# Altium PCB RS422 Breakout.PcbDoc
Units mm, origin at the board's own origin, x right, y up, seen from the top; angles counter-clockwise.
Board outline 29.84 x 34.93 mm, 4 copper layers (L1 - Primary, L2 - GND, L3 - GND, L4 - Secondary), stack 1.57 mm thick; 47 components, 32 nets, 134 pads, 106 vias.
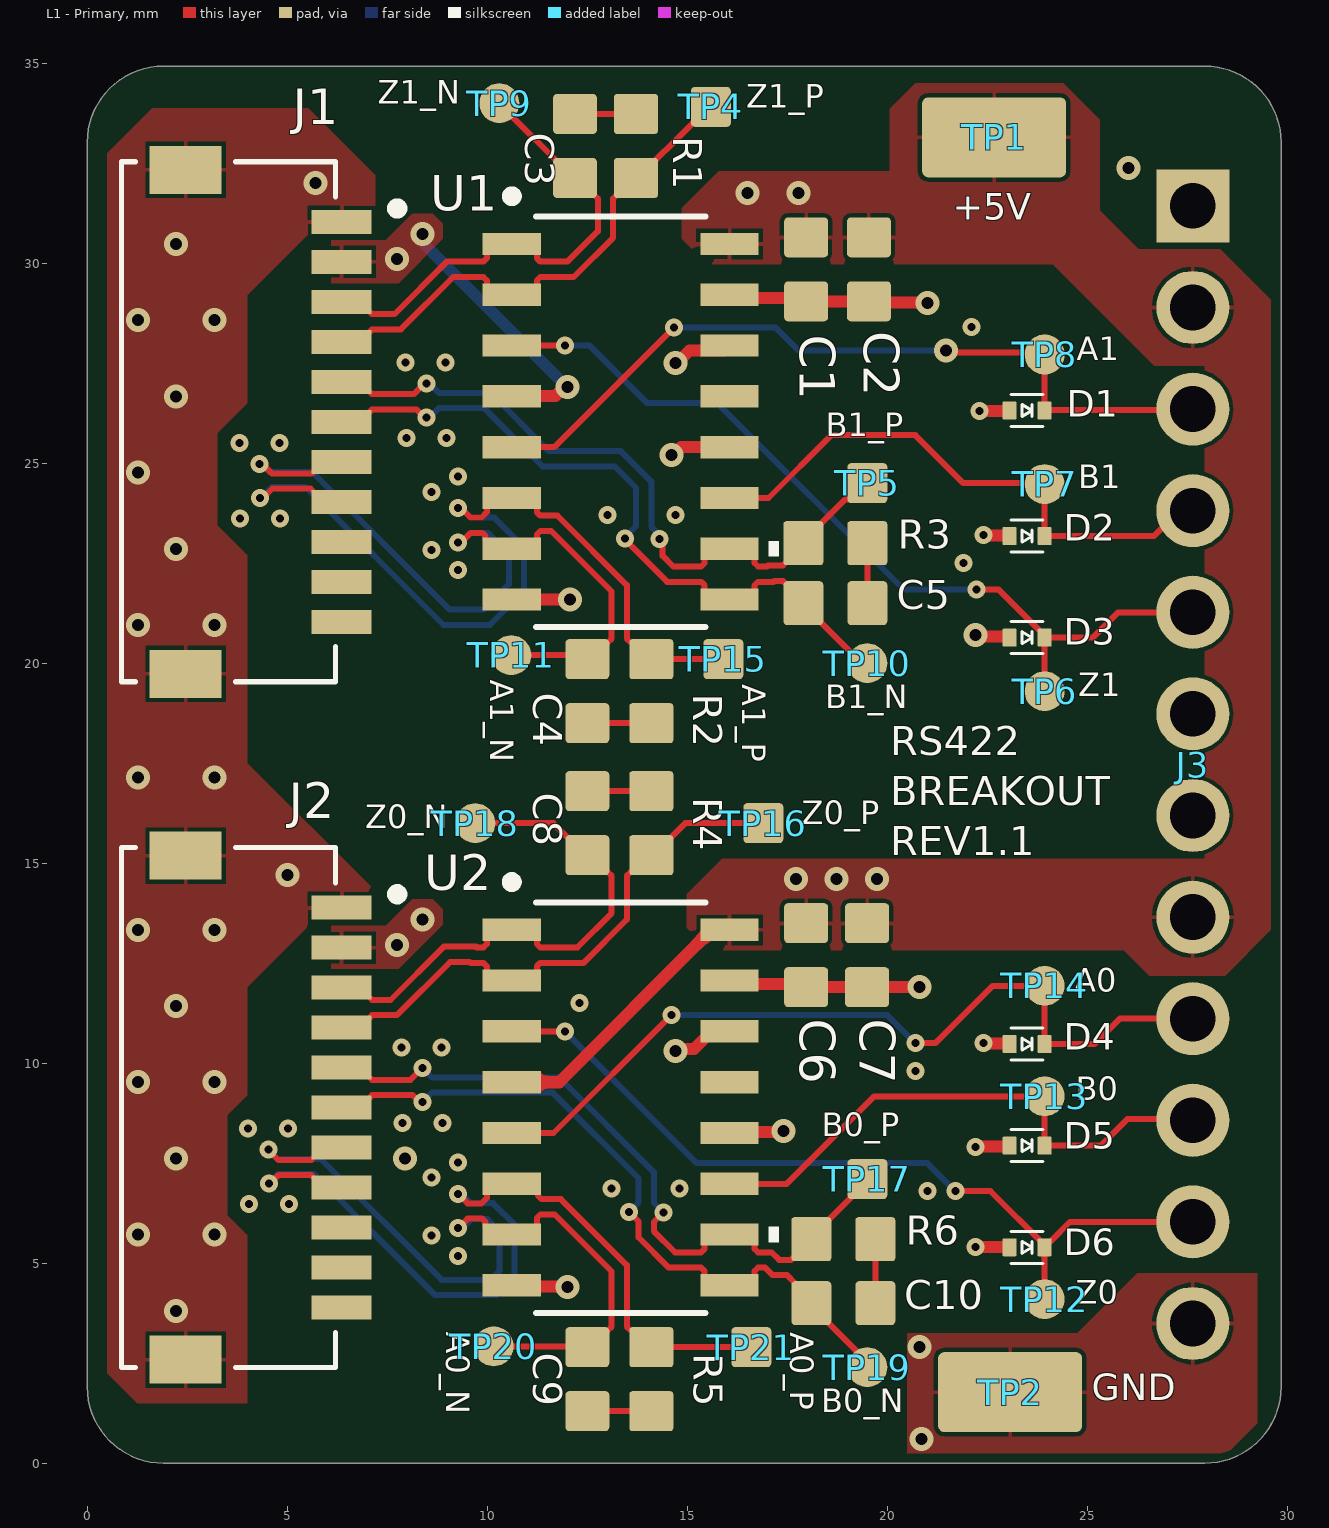
[diagram p0: L1 - Primary view]
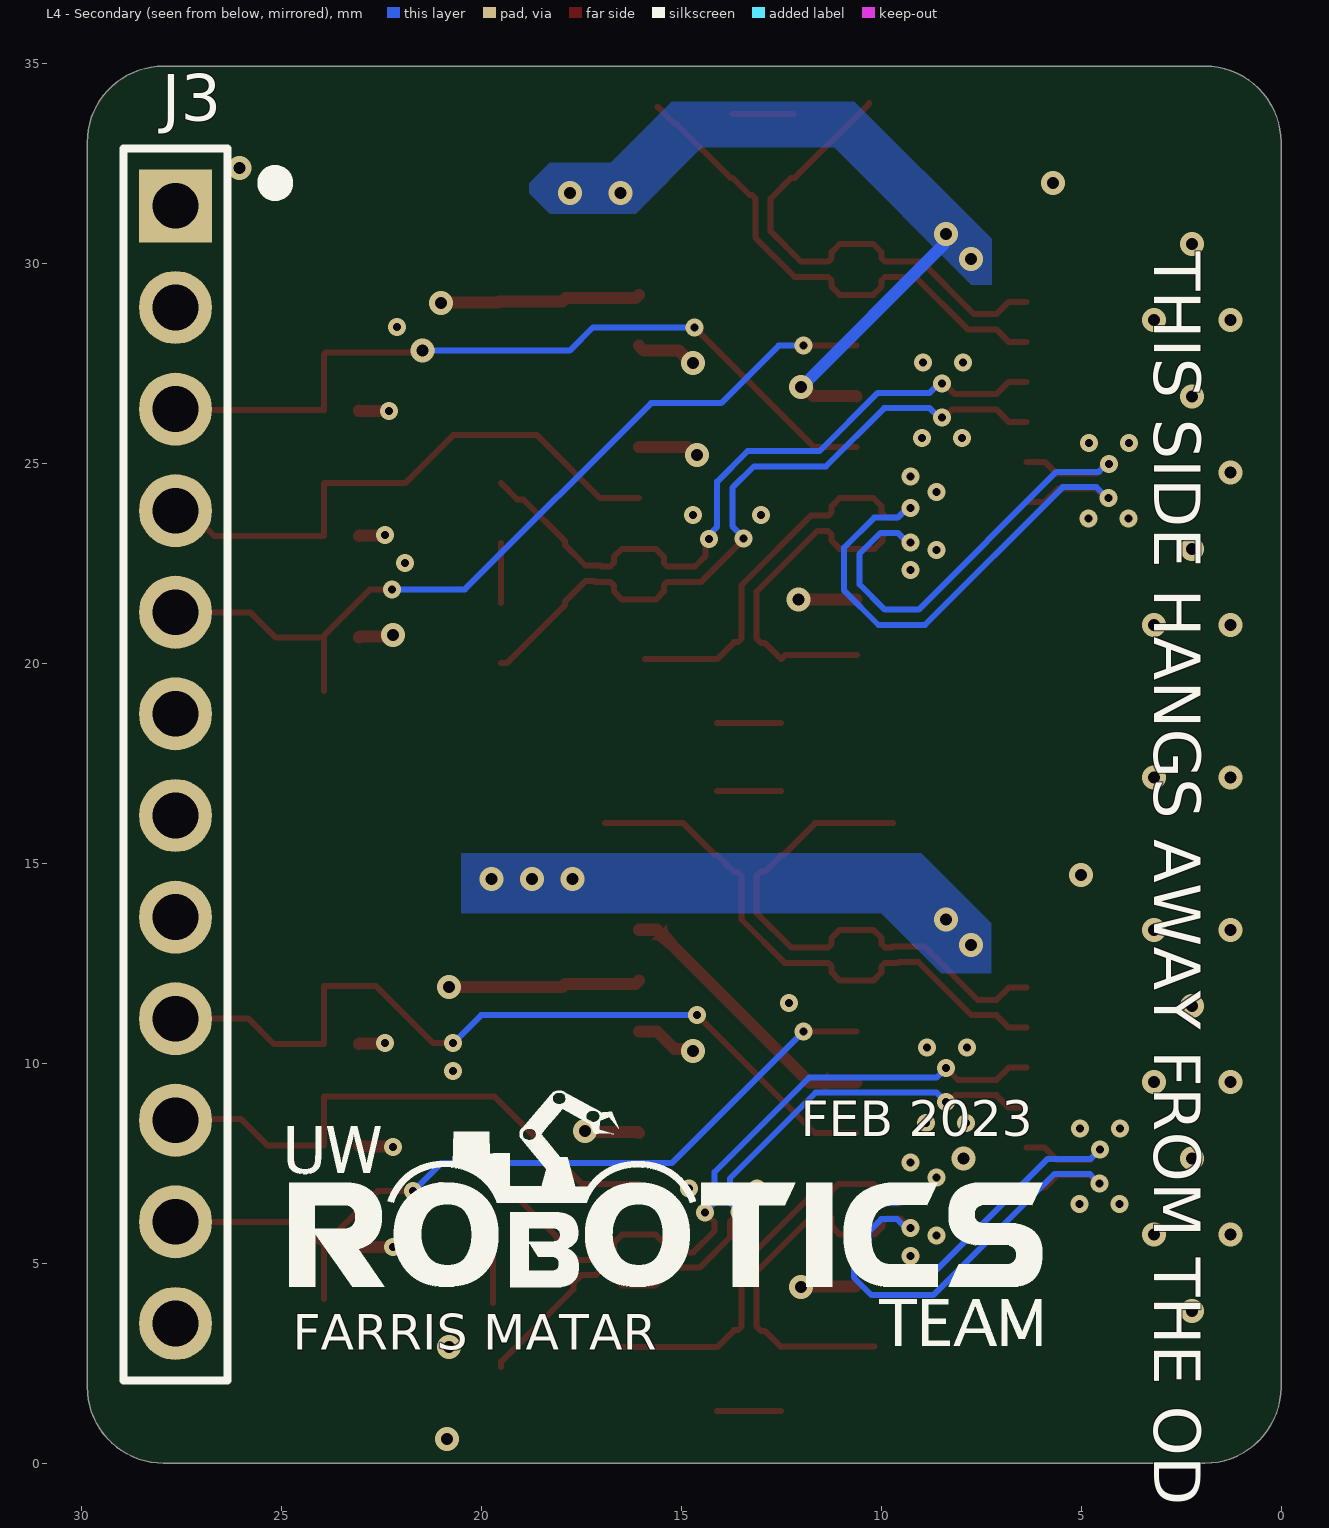
[diagram p1: L4 - Secondary view, seen from below]
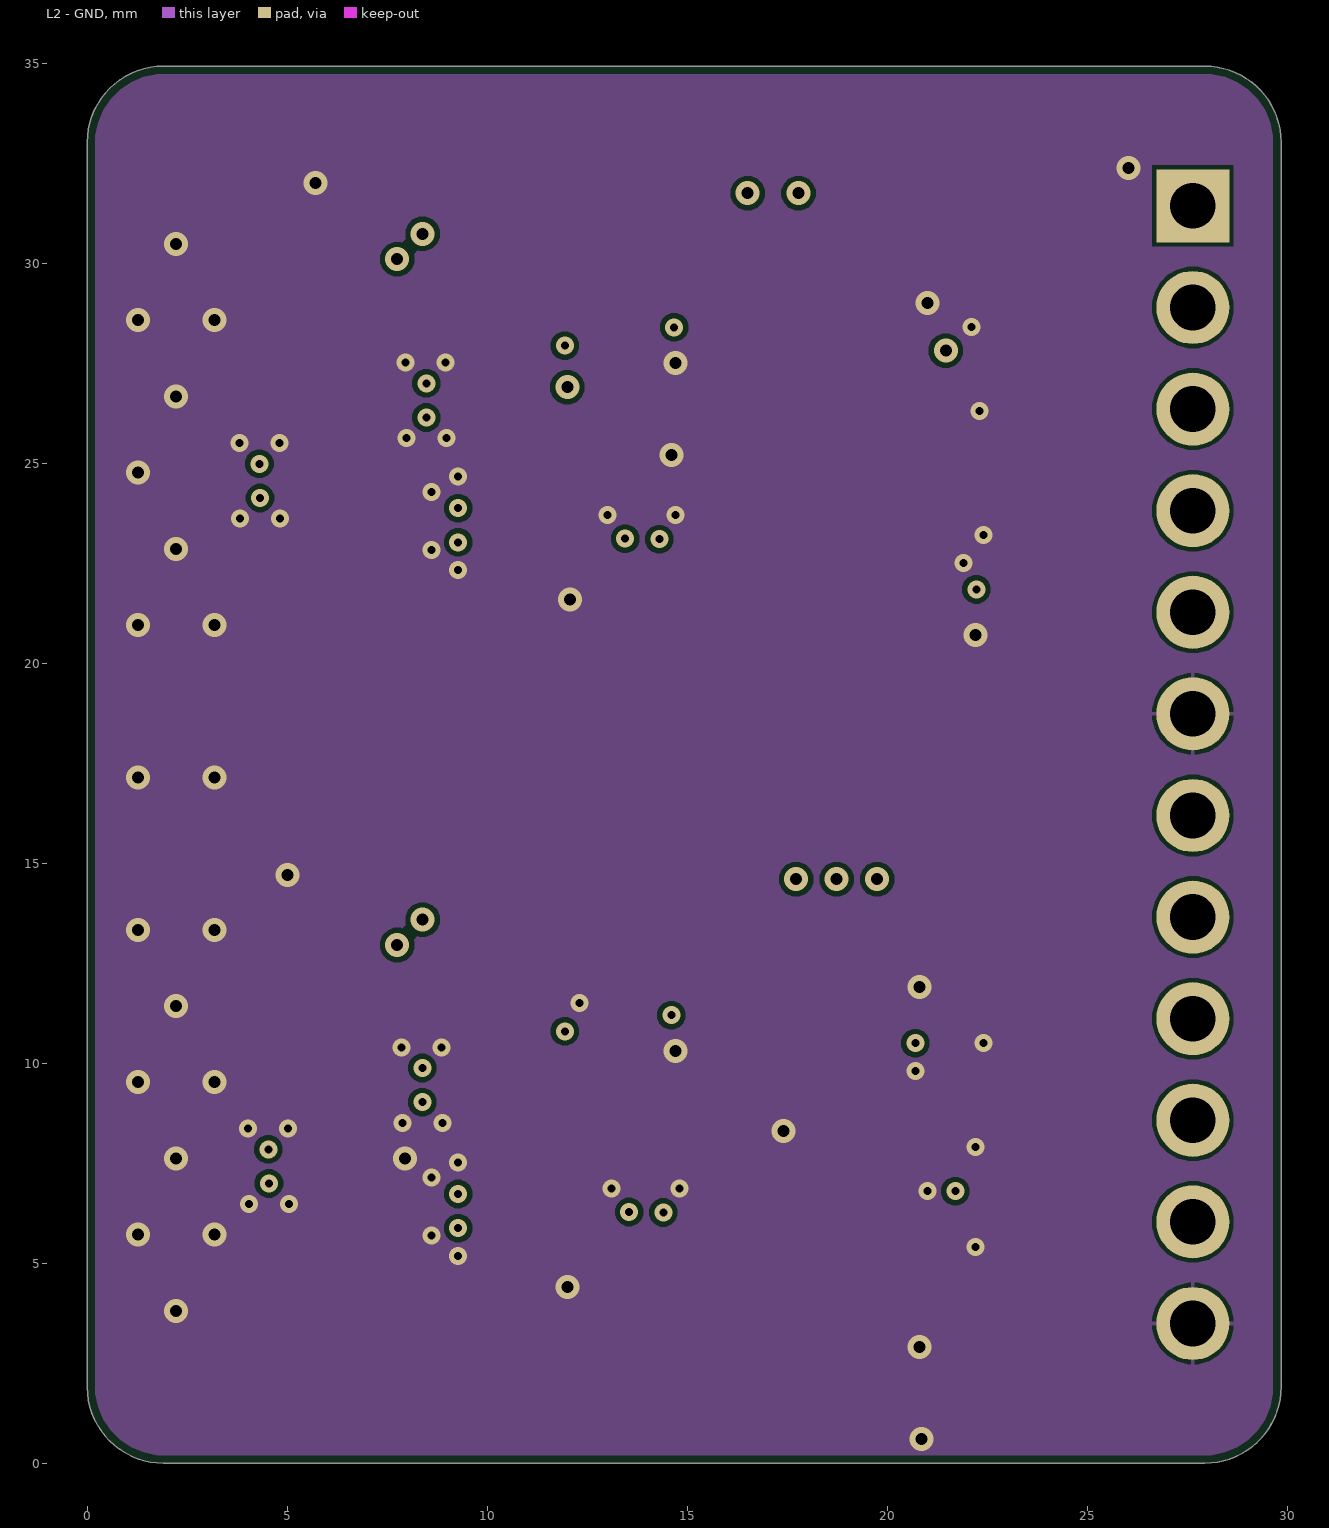
[diagram p2: L2 - GND]
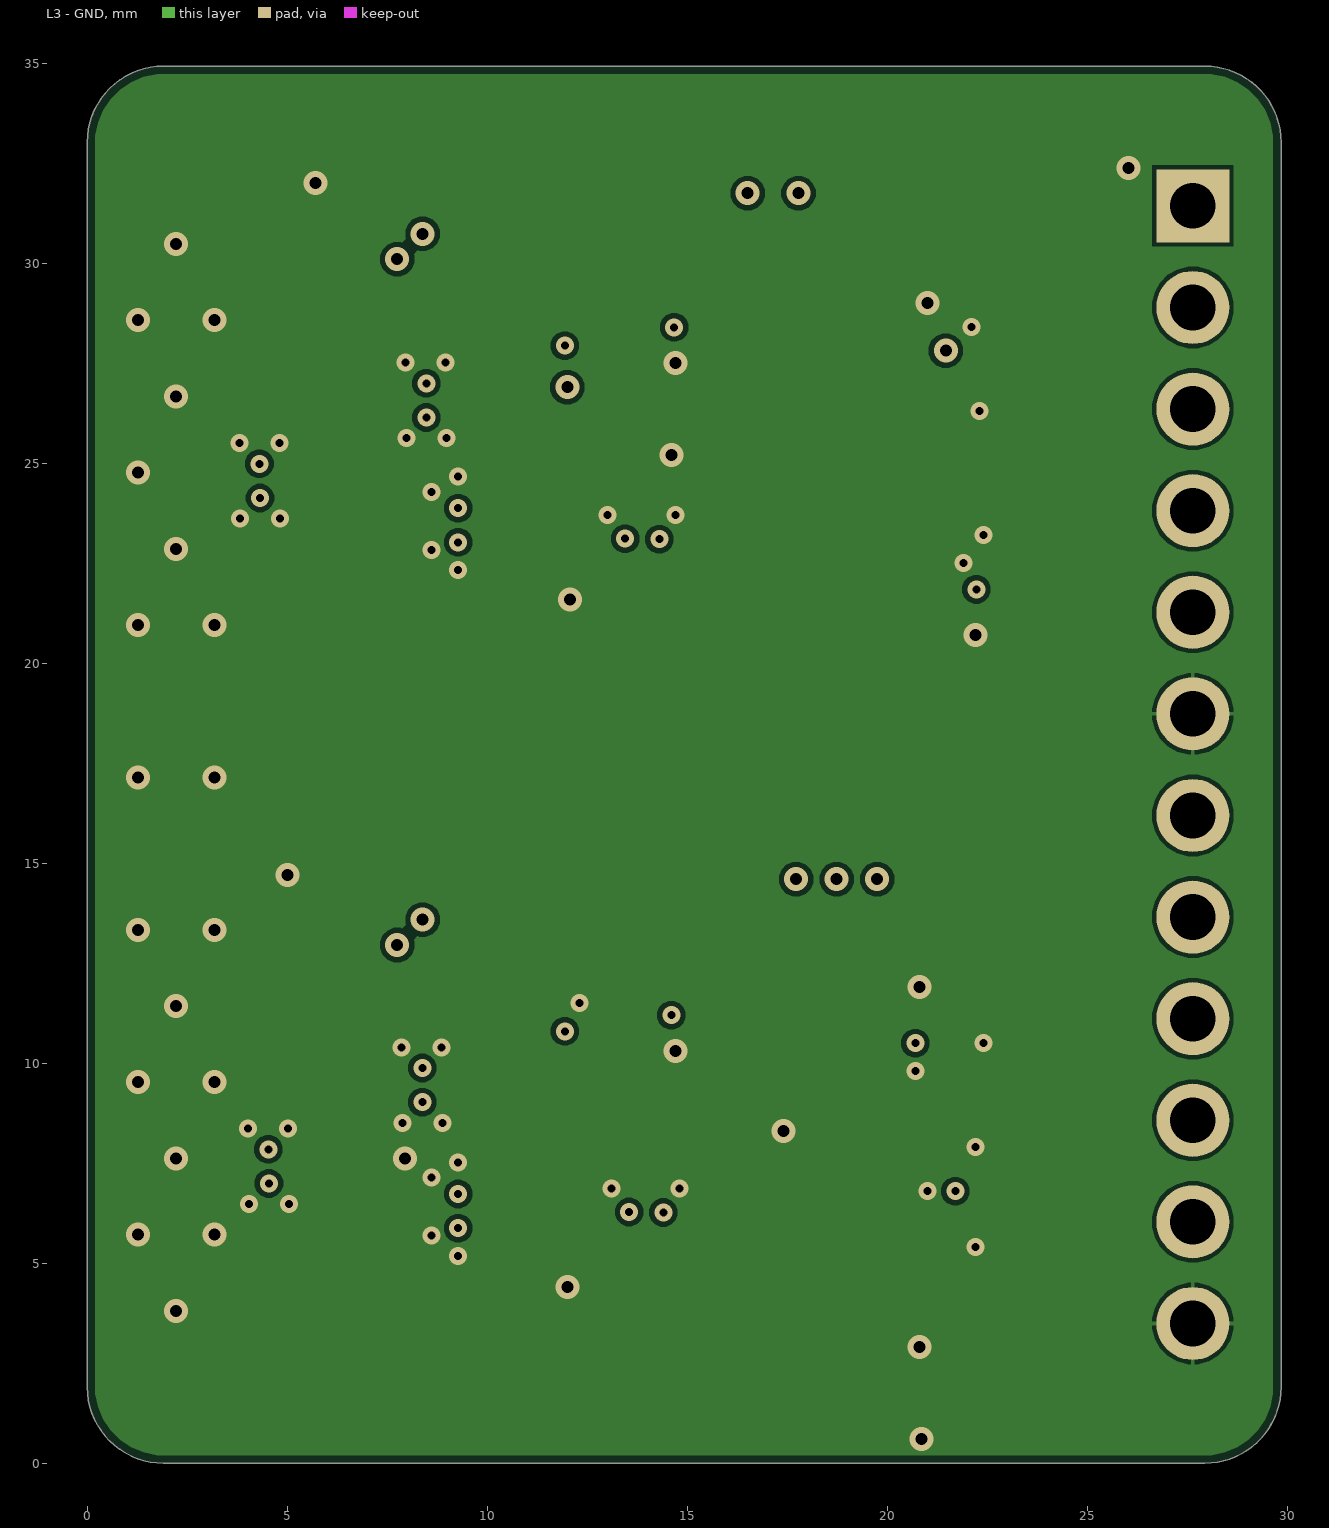
[diagram p3: L3 - GND]
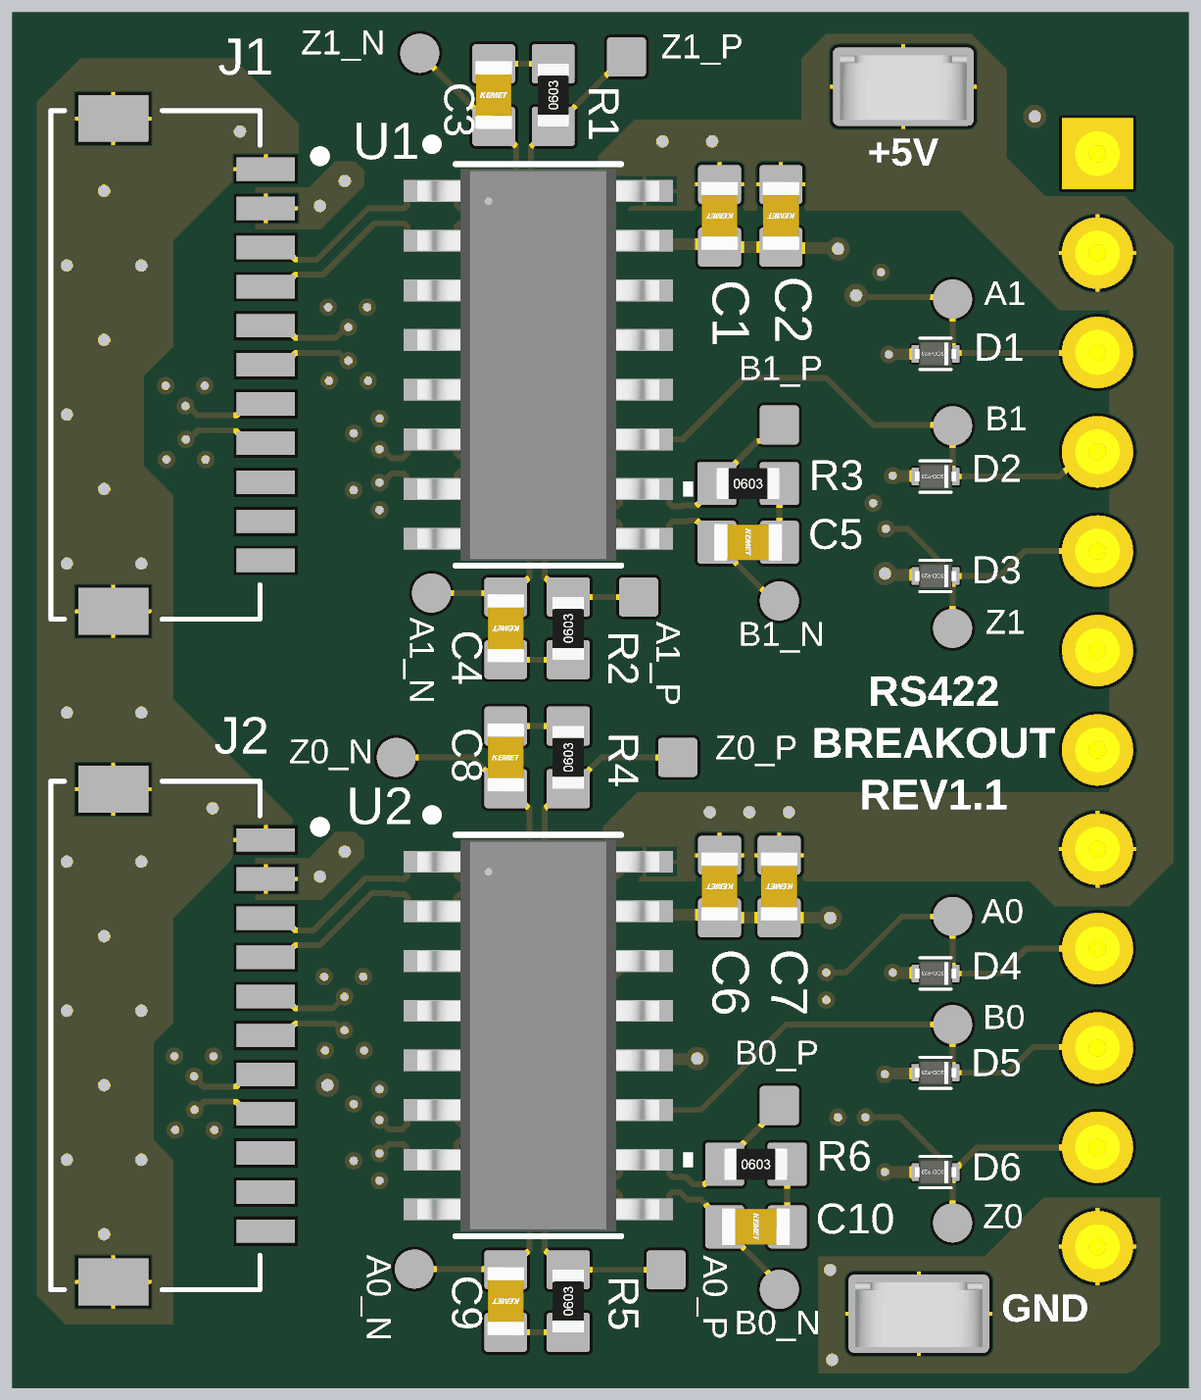
[diagram p4: 3D render of the assembled board from above, using the file's embedded part models]

## Layer stack, top to bottom
Top Solder: solder mask 0.0127, Solder Resist, Dk 3.8
L1 - Primary: signal copper 0.035
Dielectric 1: prepreg 0.2, 7628, Dk 4.6
L2 - GND: signal copper 0.0175
Core: core 1.065, FR-4, Dk 4.5
L3 - GND: signal copper 0.0175
Dielectric 2: prepreg 0.2, 7628, Dk 4.6
L4 - Secondary: signal copper 0.035
Bottom Solder: solder mask 0.0127, Solder Resist, Dk 3.8

## Board outline
0,1.905 0,33.02 cw(c1.905,33.02) 1.905,34.925 27.94,34.925 cw(c27.94,33.02) 29.845,33.02 29.845,1.905 cw(c27.94,1.905) 27.94,0 1.905,0 cw(c1.905,1.905)

## Design rules (kind name [scope] priority, off if disabled: settings)
BoardOutlineClearance [All] p1: gap=0.2 ignorepadtopadclearanceinfootprint=FALSE
Clearance [All] p1: gap=0.102 ignorepadtopadclearanceinfootprint=FALSE except(0.127: Arc-Via Track-Via SMDPad-Via THPad-Via Via-Via Via-Fill Via-Poly Via-Region Via-Text; 0.25: Arc-Hole Track-Hole SMDPad-Hole THPad-Hole Via-Hole Fill-Hole Poly-Hole Region-Hole Text-Hole)
ComponentClearance [All] p1: gap=0.102 collisioncheckmode=3 verticalgap=0.102 showdistances=TRUE
DiffPairsRouting [All] p1: maxlimit=0.232 minlimit=0.102 mostfreqgap=0.232 toplayer_mingap=0.232 toplayer_minwidth=0.15 toplayer_maxwidth=0.15 toplayer_prefwidth=0.15 bottomlayer_mingap=0.232 bottomlayer_minwidth=0.15 bottomlayer_maxwidth=0.15 bottomlayer_prefwidth=0.15 impedanceprofiledriven=TRUE impedanceprofileid={AE764A9E-1746-4FC1-8AB7-64DEA7011EAA} impedanceprofilevalue=120.000000 maxuncoupledlength=12.7
Height [All] p1: minheight=0 maxheight=1816.048 prefheight=12.7
HoleSize [All] p1: absolutevalues=TRUE maxlimit=6.3 minlimit=0.2 maxpercent=80.000 minpercent=20.000
HoleToHoleClearance [All] p1: gap=0.25 allowstackedmicrovias=FALSE
MinimumAnnularRing [All] p1: minimumring=0.076
MinimumSolderMaskSliver [All] p1: minsoldermaskwidth=0
PlaneClearance [All] p1: clearance=0.102
PlaneConnect PlaneConnectPowerPads [InPadClass('PowerPads')] p1: planeconnectstyle=Direct reliefexpansion=0.508 reliefentries=4 reliefconductorwidth=0.254 reliefairgap=0.254
PlaneConnect [All] p2: pad.planeconnectstyle=Relief pad.reliefexpansion=0.3 pad.reliefentries=4 pad.reliefconductorwidth=0.102 pad.reliefairgap=0.102 via.planeconnectstyle=Direct via.reliefexpansion=0.3 via.reliefentries=4 via.reliefconductorwidth=0.127 via.reliefairgap=0.127
PolygonConnect PolygonConnectPowerPads [All vs (InPadClass('PowerPads'))] p1: connectstyle=Direct reliefconductorwidth=0.254 reliefentries=4 polygonreliefangle="90 Angle" airgapwidth=0.254
PolygonConnect [All] p2: thpad.connectstyle=Relief thpad.reliefconductorwidth=0.102 thpad.reliefentries=4 thpad.polygonreliefangle="90 Angle" thpad.airgapwidth=0.102 smdpad.connectstyle=Relief smdpad.reliefconductorwidth=0.102 smdpad.reliefentries=4 smdpad.polygonreliefangle="90 Angle" smdpad.airgapwidth=0.102 via.connectstyle=Direct via.reliefconductorwidth=0.127 via.reliefentries=4 via.polygonreliefangle="90 Angle" via.airgapwidth=0.127
RoutingVias [All] p1: holewidth=0.2 width=0.45 viastyle="Through Hole" minholewidth=0.2 minwidth=0.45 maxholewidth=6.3 maxwidth=6.55
SilkToSilkClearance [All] p1: silktosilkclearance=0
SilkToSolderMaskClearance [IsPad] p1: minsilkscreentomaskgap=0.102 clearancetoexposedcopper=TRUE
SolderMaskExpansion [All] p1: expansion=0.075 istentingtop=FALSE
Width [All] p1: maxlimit=1816.048 minlimit=0.102 preferedwidth=0.102
20 further rules are at their usual default settings.

## Classes and differential pairs
differential pair Z1: +Z1_P -Z1_N
differential pair Z0: +Z0_P -Z0_N
differential pair B1: +B1_P -B1_N
differential pair B0: +B0_P -B0_N
differential pair A1: +A1_P -A1_N
differential pair A0: +A0_P -A0_N

## Components (designator, comment, footprint, x,y, rotation, side; value= is the part's Value field where it differs from the comment)
C1 "CAP_1uF_25V_0603" CAP0603 17.971,29.845 r90 top value=1μF
C2 "CAP_0.1uF_10V_0603" CAP0603 19.541,29.845 r90 top value=0.1µF
C3 "CAP_0.01uF_100V_0603" CAP0603 12.192,32.931 r270 top value=0.01μF
C4 "CAP_0.01uF_100V_0603" CAP0603 12.5,19.3 r90 top value=0.01μF
C5 "CAP_0.01uF_100V_0603" CAP0603 18.7,21.5 r180 top value=0.01μF
C6 "CAP_1uF_25V_0603" CAP0603 17.971,12.7 r90 top value=1μF
C7 "CAP_0.1uF_10V_0603" CAP0603 19.495,12.7 r90 top value=0.1µF
C8 "CAP_0.01uF_100V_0603" CAP0603 12.5,16 r270 top value=0.01μF
C9 "CAP_0.01uF_100V_0603" CAP0603 12.5,2.1 r90 top value=0.01μF
C10 "CAP_0.01uF_100V_0603" CAP0603 18.9,4 r180 top value=0.01μF
D1 "TVS_DIODE_UNIDIR_5V" sod-923 23.495,26.317 r180 top
D2 "TVS_DIODE_UNIDIR_5V" sod-923 23.495,23.177 r180 top
D3 "TVS_DIODE_UNIDIR_5V" sod-923 23.495,20.637 r180 top
D4 "TVS_DIODE_UNIDIR_5V" sod-923 23.495,10.477 r180 top
D5 "TVS_DIODE_UNIDIR_5V" sod-923 23.495,7.938 r180 top
D6 "TVS_DIODE_UNIDIR_5V" sod-923 23.495,5.397 r180 top
J1 "CON_12M_SM_RA" MOLEX-5015681107 3.81,26.035 r270 top
J2 "CON_12M_SM_RA" MOLEX-5015681107 3.81,8.89 r270 top
J3 "Samtech, TS-112-T-A" Samtech-TS-112-T-A 27.64,17.462 r0 top
R1 "RES_120Ω_0603_5%" RES0603 13.716,32.131 r90 top value=120Ω
R2 "RES_120Ω_0603_5%" RES0603 14.1,18.5 r90 top value=120Ω
R3 "RES_120Ω_0603_5%" RES0603 17.9,23 r0 top value=120Ω
R4 "RES_120Ω_0603_5%" RES0603 14.1,15.2 r90 top value=120Ω
R5 "RES_120Ω_0603_5%" RES0603 14.1,1.3 r90 top value=120Ω
R6 "RES_120Ω_0603_5%" RES0603 18.1,5.6 r0 top value=120Ω
TP1 "TESTPOINT_SMD_LOOP" S1751-46R 22.671,33.147 r0 top
TP2 "TESTPOINT_SMD_LOOP" S1751-46R 23.071,1.778 r0 top
TP4 "TESTPOINT_1MM_SQUARE" TESTPOINT_SQUARE_1MM 15.588,33.909 r270 top
TP5 "TESTPOINT_1MM_SQUARE" TESTPOINT_SQUARE_1MM 19.5,24.5 r90 top
TP6 "TESTPOINT_1MM_CIRCLE" TESTPOINT_CIRCLE_1MM 23.932,19.3 r90 top
TP7 "TESTPOINT_1MM_CIRCLE" TESTPOINT_CIRCLE_1MM 23.932,24.477 r90 top
TP8 "TESTPOINT_1MM_CIRCLE" TESTPOINT_CIRCLE_1MM 23.932,27.717 r90 top
TP9 "TESTPOINT_1MM_CIRCLE" TESTPOINT_CIRCLE_1MM 10.3,34 r270 top
TP10 "TESTPOINT_1MM_CIRCLE" TESTPOINT_CIRCLE_1MM 19.5,20 r90 top
TP11 "TESTPOINT_1MM_CIRCLE" TESTPOINT_CIRCLE_1MM 10.6,20.2 r90 top
TP12 "TESTPOINT_1MM_CIRCLE" TESTPOINT_CIRCLE_1MM 23.932,4.1 r90 top
TP13 "TESTPOINT_1MM_CIRCLE" TESTPOINT_CIRCLE_1MM 23.932,9.171 r90 top
TP14 "TESTPOINT_1MM_CIRCLE" TESTPOINT_CIRCLE_1MM 23.932,11.935 r90 top
TP15 "TESTPOINT_1MM_SQUARE" TESTPOINT_SQUARE_1MM 15.9,20.1 r90 top
TP16 "TESTPOINT_1MM_SQUARE" TESTPOINT_SQUARE_1MM 16.9,16 r90 top
TP17 "TESTPOINT_1MM_SQUARE" TESTPOINT_SQUARE_1MM 19.5,7.1 r90 top
TP18 "TESTPOINT_1MM_CIRCLE" TESTPOINT_CIRCLE_1MM 9.7,16 r90 top
TP19 "TESTPOINT_1MM_CIRCLE" TESTPOINT_CIRCLE_1MM 19.5,2.4 r90 top
TP20 "TESTPOINT_1MM_CIRCLE" TESTPOINT_CIRCLE_1MM 10.16,2.921 r90 top
TP21 "TESTPOINT_1MM_SQUARE" TESTPOINT_SQUARE_1MM 16.6,2.9 r90 top
U1 "SN75ALS193DR" SOIC127P600X175-16N 13.335,26.035 r0 top
U2 "SN75ALS193DR" SOIC127P600X175-16N 13.335,8.89 r0 top

## Footprints (in the part's own frame and the unit in brackets; to place one, negate y for a bottom-side part, rotate by r counter-clockwise, add the part's x,y. Pads: shape width x height; smd on the part's side, far side on the other; paste and mask are expansions set on the pad)
CAP0603 [mm]
  rrect20% 1x1.1 smd: 1(-0.8,0) 2(0.8,0)
  body extent -0.87,-0.48 0.88,0.48, height 0.87
MOLEX-5015681107 [mm]
  rect 0.6x1.5 smd mask+0: 1(-5,2.55) 2(-4,2.55) 3(-3,2.55) 4(-2,2.55) 5(-1,2.55) 6(0,2.55) 7(1,2.55) 8(2,2.55) 9(3,2.55) 10(4,2.55) 11(5,2.55)
  rect 1.2x1.8 smd mask+0: S1(6.3,-1.35) S2(-6.3,-1.35)
  silkscreen extent -6.5,-2.95 6.5,2.4
RES0603 [mm] "Chip Resistor, Body 1.6x0.8mm, IPC Medium Density"
  rrect15% 1x1.1 smd: 1(0,0) 2(1.6,0)
  body extent 0,-0.4 1.6,0.4, height 0.46
S1751-46R [mm] "SMD LOOP TESTPOINT"
  rrect15% 3.6x2 smd: 1(0,0)
  body extent -1.63,-0.85 1.62,0.8, height 2.01
Samtech-TS-112-T-A [mil] "Samtech CONN HEADER VERT 12POS 2.54MM"
  rect 71.93x71.93 hole 45: 1(0,550)
  round 71.93 hole 45: 2(0,450) 3(0,350) 4(0,250) 5(0,150) 6(0,50) 7(0,-50) 8(0,-150) 9(0,-250) 10(0,-350) 11(0,-450) 12(0,-550)
  body extent -50,-604 50,604, height 120
sod-923 [mm]
  rrect15% 0.35x0.45 smd mask+0.05: 1(-0.437,0) 2(0.437,0)
  silkscreen extent -0.4,-0.4 0.4,0.4, body extent -0.53,-0.32 0.53,0.32, height 0.43
SOIC127P600X175-16N [mm]
  rect 1.455x0.558 smd paste+0 mask+0: 1(-2.721,4.445) 2(-2.721,3.175) 3(-2.721,1.905) 4(-2.721,0.635) 5(-2.721,-0.635) 6(-2.721,-1.905) 7(-2.721,-3.175) 8(-2.721,-4.445) 9(2.721,-4.445) 10(2.721,-3.175) 11(2.721,-1.905) 12(2.721,-0.635) 13(2.721,0.635) 14(2.721,1.905) 15(2.721,3.175) 16(2.721,4.445)
  silkscreen extent -2.84,-5.13 3.96,5.76, body extent -3.1,-5 3.1,5, height 1.76
TESTPOINT_CIRCLE_1MM [mm]
  round 1 smd: 1(0,0)
TESTPOINT_SQUARE_1MM [mm]
  rrect20% 1x1 smd: 1(0,0)

## Part data
C1 C6: "CAP CER 1UF 25V X5R 0603", Dielectric=X5R, Manufacturer 1=Samsung, Manufacturer Part Number 1=CL10A105KA8NNNC, Package=0603, Supplier Part Number 1=1276-1102-1-ND, Voltage Rating=25V, Mounting Type=SMD, Supplier 1=Digi-Key
C2 C7: "CAP CER 0.1UF 10V X7R 0402", Manufacturer 1="Murata Electronics", Manufacturer Part Number 1=GRM155R71A104KA01D, Package/Footprint=0402, Supplier Part Number 1=490-6321-1-ND, Voltage Rating=10V, Supplier 1=Digi-Key
C3 C4 C5 C8 C9 C10: "CAP CER 0.01uF 100V X7R 0603", Dielectric=X7R, Manufacturer 1="Murata Electronics", Manufacturer Part Number 1=GCM188R72A103KA37J, Supplier Part Number 1=490-8028-1-ND, Voltage Rating=100V, Supplier 1=Digi-Key
D1 D4: "TVS DIODE 5VWM 12.3VC SOD923", Clamping Voltage-Max=12.3V, Manufacturer 1="ON Semiconductor", Manufacturer Part Number 1=ESD9X5.0ST5G, Min Breakdown Voltage=6.2V, Supplier Part Number 1=ESD9X5.0ST5GOSCT-ND, Supplier 1=Digi-Key
D2 D3 D5 D6: "TVS DIODE 5VWM 12.3VC SOD923", Clamping Voltage-Max=12.3V, Manufacturer 1="ON Semiconductor", Min Breakdown Voltage=6.2V, Supplier Part Number 1=ESD9X5.0ST5GOSCT-ND, Supplier 1=Digi-Key
J1 J2: library part CON_11M_SM_RA, "CONN HEADER SMD RIGHT ANGLE 1MM PITCH", Package=None, Supplier Part Number 1=WM7902CT-ND, Availability=Unavailable, MP="Molex, 5015681107", Price=None, Supplier 1=Digi-Key
J3: library part CON_12M_TH_VERT_2.54mm, "CONN HEADER THROUGH HOLE VERTICAL 2.54MM PITCH", Supplier Part Number 1=SAM12216-ND, Manufacturing Part Number="Samtech, TS-112-T-A", Supplier 1=Digi-Key
R1 R2 R3 R4 R5 R6: "RES 120 OHM 5% 1/10W 0603", Manufacturer 1=Yageo, Manufacturer Part Number 1=RC0603JR-07120RL, Package/Footprint=0603, Supplier Part Number 1=311-120GRCT-ND, Mounting Type=SMD, Supplier 1=Digi-Key
TP1 TP2: "TESTPOINT SMD LOOP", Manufacturer 1=Harwin, Manufacturer Part Number 1=S1751-46R, Package/Footprint=SMD, Supplier Part Number 1=952-1478-1-ND, Mounting Type=SMD, Supplier 1=Digi-Key
TP4 TP5 TP15 TP16 TP17 TP21: "TESTPOINT 1MM SQUARE"
TP6 TP7 TP8 TP9 TP10 TP11 TP12 TP13 TP14 TP18 TP19 TP20: "TESTPOINT 1MM CIRCLE"
U1 U2: "0/4 Receiver - RS422, RS423 16-SOIC", Mfr_Name="Texas Instruments", Supplier Part Number 1=296-24362-1-ND, Copyright="Copyright (C) 2021 Ultra Librarian. All rights reserved.", Manufacturer_Part_Number=SN75ALS193DR, RefDes=RefDes, Supplier 1=Digi-Key, Type=DEV

## Via types
v1: diameter 0.45, hole 0.2, L1 - Primary to L4 - Secondary, tented both sides, 61 vias
v2: diameter 0.6, hole 0.3, L1 - Primary to L4 - Secondary, tented both sides, 45 vias

## Nets (pads, with @x,y where several pads share a name; then routed paths per layer and width w, separated by ;. In a path a pad name is that pad's centre, name@x,y a point inside that pad or via, vN(x,y) a via of type N, cw(c..) or ccw(c..) an arc to the next point about the centre after c; other vN are vias at no path point)
5V: C1.2 C2.2 C6.2 C7.2 J1.2 J2.2 J3.2 J3.8 TP1.1 U1.4 U1.16 U2.4 U2.16 | length 13.8
  L1 - Primary w0.3: U1.4 10.629,26.685 11.704,26.685 11.919,26.9 v2(12,26.9)
  L1 - Primary w0.305: U2.4 11.798,9.525 15.481,13.208 15.608,13.335 U2.16
  L4 - Secondary w0.3: v2(8.382,30.734) 8.439,30.677 8.439,30.461 v2(12,26.9)
  other v2: 7.747,12.954 8.382,13.589 17.721,14.6 18.733,14.6 19.745,14.6 7.747,30.099 16.51,31.75 17.78,31.75
A0: D4.1 J3.9 TP14.1 U2.5 | length 20.9
  L1 - Primary w0.15: U2.5 11.655,8.255 v1(14.6,11.2) ; v1(20.7,10.5) 21.2,10.5 22.635,11.935 TP14.1 D4.1 25.177,10.477 25.812,11.112 J3.9
  L4 - Secondary w0.15: v1(14.6,11.2) 20,11.2 v1(20.7,10.5)
A0_N: C9.2 J2.7 TP20.1 U2.7 | length 21.2
  L1 - Primary w0.15: v1(4.526,7.847) 4.526,7.832 4.777,7.581 5.601,7.581 5.91,7.89 J2.7 ; v1(9.271,5.877) 9.273,5.877 9.509,6.113 9.873,6.113 9.961,6.025 9.961,5.919 10.165,5.715 U2.7 11.034,5.715 11.238,5.919 11.238,6.13 11.326,6.218 11.682,6.218 13.109,4.791 13.109,3.413 13.006,3.31 12.91,3.31 C9.2 12.479,2.921 TP20.1
  L4 - Secondary w0.15: v1(4.526,7.847) v1(4.526,7.847) 4.764,7.611 5.829,7.611 8.858,4.582 10.082,4.582 10.3,4.8 10.3,5.8 10,6.1 9.6,6.1 9.377,5.877 v1(9.271,5.877)
A0_P: J2.8 R5.2 TP21.1 U2.6 | length 23.1
  L1 - Primary w0.15: v1(4.541,6.993) 4.572,6.993 4.779,7.199 5.601,7.199 5.91,6.89 J2.8 ; v1(9.271,6.731) 9.273,6.731 9.509,6.495 9.855,6.495 9.989,6.629 9.989,6.781 10.193,6.985 11.062,6.985 11.266,6.781 11.266,6.688 11.354,6.6 11.84,6.6 13.491,4.949 13.491,3.413 13.579,3.325 13.675,3.325 R5.2 TP21.1
  L4 - Secondary w0.15: v1(4.541,6.993) v1(4.541,6.993) 4.779,7.229 5.671,7.229 8.7,4.2 10.24,4.2 10.682,4.642 10.682,5.958 10.14,6.5 9.584,6.5 9.353,6.731 v1(9.271,6.731)
A1: D1.1 J3.3 TP8.1 U1.5 | length 20
  L1 - Primary w0.15: U1.5 11.672,25.4 v1(14.67,28.397) ; v2(21.463,27.813) 21.511,27.765 23.885,27.765 TP8.1 D1.1 23.95,26.335 27.622,26.335 J3.3
  L4 - Secondary w0.15: v1(14.67,28.397) 17.203,28.397 17.787,27.813 v2(21.463,27.813)
A1_N: C4.2 J1.7 TP11.1 U1.7 | length 21.6
  L1 - Primary w0.15: v1(4.303,24.984) 4.38,24.984 4.616,24.748 5.623,24.748 5.91,25.035 J1.7 ; v1(9.271,23.022) 9.348,23.022 9.584,23.258 9.873,23.258 9.961,23.17 9.961,23.064 10.165,22.86 U1.7 11.034,22.86 11.238,23.064 11.238,23.216 11.326,23.304 11.596,23.304 13.109,21.791 13.109,20.613 13.006,20.51 12.91,20.51 C4.2 12.4,20.2 TP11.1
  L4 - Secondary w0.15: v1(4.303,24.984) 4.349,24.984 4.551,24.782 5.618,24.782 9.063,21.337 9.907,21.337 10.541,21.971 10.541,22.733 10.016,23.258 9.584,23.258 9.348,23.022 v1(9.271,23.022)
A1_P: J1.8 R2.2 TP15.1 U1.6 | length 23.5
  L1 - Primary w0.15: v1(4.318,24.13) 4.395,24.13 4.631,24.366 5.579,24.366 5.91,24.035 J1.8 ; v1(9.271,23.876) 9.348,23.876 9.584,23.64 9.855,23.64 9.989,23.774 9.989,23.926 10.193,24.13 U1.6 11.034,24.13 11.238,23.926 11.238,23.774 11.326,23.686 11.754,23.686 13.491,21.949 13.491,20.613 13.579,20.525 13.675,20.525 R2.2 TP15.1
  L4 - Secondary w0.15: v1(4.318,24.13) 4.344,24.13 4.614,24.4 5.46,24.4 8.905,20.955 10.065,20.955 10.923,21.813 10.923,22.891 10.174,23.64 9.584,23.64 9.348,23.876 v1(9.271,23.876)
B0: D5.1 J3.10 TP13.1 U2.11 | length 14
  L1 - Primary w0.15: U2.11 17.485,6.985 19.671,9.171 TP13.1 D5.1 25.337,7.938 26,8.6 27.612,8.6 J3.10
B0_N: C10.2 J2.6 TP19.1 U2.9 | length 18.1
  L1 - Primary w0.15: J2.6 6.81,8.89 7.119,9.199 8.136,9.199 8.31,9.025 v1(8.374,9.025) ; v1(13.546,6.279) v1(13.546,6.279) 13.782,6.042 13.782,5.642 14.535,4.889 15.344,4.889 15.432,4.801 15.432,4.649 15.636,4.445 U2.9 16.477,4.445 16.681,4.649 16.681,4.801 16.769,4.889 16.947,4.889 17.136,4.7 17.496,4.7 17.69,4.506 17.69,4.346 19.5,2.536 TP19.1
  L4 - Secondary w0.15: v1(8.374,9.025) 8.376,9.025 8.612,9.261 11.639,9.261 13.782,7.118 13.782,6.517 13.546,6.281 v1(13.546,6.279)
B0_P: J2.5 R6.1 TP17.1 U2.10 | length 17.9
  L1 - Primary w0.15: J2.5 6.81,9.89 7.119,9.581 8.078,9.581 v1(8.374,9.879) v1(8.374,9.879) ; v1(14.4,6.267) v1(14.4,6.267) 14.164,6.029 14.164,5.8 14.693,5.271 15.344,5.271 15.432,5.359 15.432,5.511 15.636,5.715 U2.10 16.477,5.715 16.681,5.511 16.681,5.359 16.769,5.271 17.105,5.271 17.294,5.082 17.587,5.082 17.63,5.125 17.675,5.125 R6.1@18.1,5.55 ; R6.1 18.1,5.65 19.09,6.64 19.09,6.69 TP17.1
  L4 - Secondary w0.15: v1(8.374,9.879) 8.376,9.879 8.612,9.643 11.797,9.643 14.164,7.276 14.164,6.505 14.4,6.269 v1(14.4,6.267)
B1: D2.1 J3.4 TP7.1 U1.11 | length 14.3
  L1 - Primary w0.15: U1.11 17.03,24.13 18.6,25.7 20.7,25.7 21.9,24.5 23.91,24.5 TP7.1 D2.1 26.664,23.177 27.299,23.812 J3.4
B1_N: C5.2 J1.6 TP10.1 U1.9 | length 17.9
  L1 - Primary w0.15: J1.6 6.81,26.035 7.119,26.344 8.224,26.344 8.427,26.141 v1(8.474,26.141) ; v1(13.446,23.112) 13.446,23.083 14.495,22.034 15.344,22.034 15.432,21.946 15.432,21.794 15.636,21.59 U1.9 16.477,21.59 16.681,21.794 16.681,21.946 16.769,22.034 17.15,22.034 17.175,22.059 17.387,22.059 17.9,21.546 C5.2 17.9,21.464 19.364,20 TP10.1
  L4 - Secondary w0.15: v1(8.474,26.141) 8.551,26.141 8.787,26.378 9.922,26.378 11.382,24.918 13.182,24.918 13.718,24.382 13.718,23.424 13.446,23.152 v1(13.446,23.112)
B1_P: J1.5 R3.1 TP5.1 U1.10 | length 17.7
  L1 - Primary w0.15: J1.5 6.81,27.035 7.119,26.726 8.158,26.726 8.427,26.995 v1(8.474,26.995) ; v1(14.3,23.1) 14.386,23.014 14.386,22.682 14.653,22.416 15.344,22.416 15.432,22.504 15.432,22.656 15.636,22.86 U1.10 16.477,22.86 16.681,22.656 16.681,22.504 16.769,22.416 16.992,22.416 17.017,22.441 17.391,22.441 17.9,22.95 R3.1 17.9,23.05 18.94,24.09 19.09,24.09 TP5.1
  L4 - Secondary w0.15: v1(8.474,26.995) 8.551,26.995 8.787,26.759 10.081,26.759 11.54,25.3 13.34,25.3 14.1,24.54 14.1,23.413 14.3,23.213 v1(14.3,23.1)
GND: C1.1 C2.1 C6.1 C7.1 D1.2 D2.2 D3.2 D4.2 D5.2 D6.2 J1.1 J1.S1 J1.S2 J2.1 J2.S1 J2.S2 J3.6 J3.12 TP2.1 U1.8 U1.12 U1.14 U1.15 U2.8 U2.12 U2.14 U2.15 | length 23.4
  L1 - Primary w0.3: U2.8 10.636,4.423 11.977,4.423 v2(12,4.4) ; U1.8 v2(12.065,21.59) ; v2(14.6,25.2) 14.641,25.2 14.841,25.4 U1.12 ; v2(14.7,10.3) 14.757,10.357 15.17,10.357 15.608,10.795 U2.14 ; v2(14.7,27.5) 14.741,27.5 15.052,27.811 15.927,27.811 U1.14 ; U2.12 16.079,8.278 17.378,8.278 v2(17.4,8.3) ; U2.15 16.139,11.983 17.889,11.983 C6.1 v2(20.8,11.9) ; U1.15 16.139,29.128 17.889,29.128 C1.1 C2.1 19.564,29.022 20.978,29.022 v2(21,29) ; v1(22.2,5.4) 22.201,5.399 23.056,5.399 D6.2 ; v1(22.2,7.9) 22.219,7.919 23.039,7.919 D5.2 ; v2(22.2,20.7) 22.231,20.669 23.032,20.669 23.058,20.644 D3.2 ; v1(22.3,26.3) 22.309,26.309 23.049,26.309 D1.2 ; v1(22.4,10.5) 22.411,10.489 23.046,10.489 D4.2 ; v1(22.4,23.2) 22.411,23.189 23.046,23.189 D2.2
  other v1: 9.271,5.18 8.609,5.688 4.044,6.477 5.044,6.477 21,6.8 13.1,6.868 14.8,6.868 8.609,7.139 9.271,7.52 4.023,8.363 5.023,8.363 7.877,8.509 8.877,8.509 20.7,9.8 7.856,10.395 8.856,10.395 12.3,11.5 9.271,22.325 21.9,22.5 8.609,22.833 3.821,23.614 4.821,23.614 13,23.7 14.7,23.7 8.609,24.284 9.271,24.665 3.8,25.5 4.8,25.5 7.977,25.625 8.977,25.625 7.956,27.511 8.956,27.511 22.1,28.4
  other v2: 20.85,0.6 20.8,2.9 2.222,3.81 1.27,5.715 3.175,5.715 2.222,7.62 7.938,7.62 1.27,9.525 3.175,9.525 2.222,11.43 1.27,13.335 3.175,13.335 5,14.7 1.27,17.145 3.175,17.145 1.27,20.955 3.175,20.955 2.222,22.86 1.27,24.765 2.222,26.67 1.27,28.575 3.175,28.575 2.222,30.48 5.7,32 26.035,32.385
NetC3_1: C3.1 R1.2 | length 1.5
  L1 - Primary w0.15: C3.1 R1.2
NetC4_1: C4.1 R2.1 | length 1.6
  L1 - Primary w0.15: C4.1 R2.1
NetC5_1: C5.1 R3.2 | length 1.5
  L1 - Primary w0.15: C5.1 R3.2
NetC8_1: C8.1 R4.2 | length 1.6
  L1 - Primary w0.15: C8.1 R4.2
NetC9_1: C9.1 R5.1 | length 1.6
  L1 - Primary w0.15: C9.1 R5.1
NetC10_1: C10.1 R6.2 | length 1.6
  L1 - Primary w0.15: C10.1 R6.2
U0: J2.9
U1: J1.9
V0: J2.10
V1: J1.10
W0: J2.11
W1: J1.11
Z0: D6.1 J3.11 TP12.1 U2.3 | length 20.8
  L1 - Primary w0.15: U2.3 v1(11.938,10.795) ; v1(21.7,6.8) 22.58,6.8 D6.1@23.932,5.447 ; TP12.1 D6.1 D6.1@23.932,5.447 ; J3.11 24.567,6.032 24.082,5.547 24.032,5.547 D6.1@23.932,5.447
  L4 - Secondary w0.15: v1(11.938,10.795) 15.233,7.5 21,7.5 v1(21.7,6.8)
Z0_N: C8.2 J2.3 TP18.1 U2.1 | length 13.2
  L1 - Primary w0.15: J2.3 6.81,11.89 7.119,11.581 7.581,11.581 8.912,12.912 9.712,12.912 9.733,12.891 9.901,12.891 9.989,12.979 9.989,13.131 10.193,13.335 U2.1 11.034,13.335 11.238,13.131 11.238,12.979 11.326,12.891 12.251,12.891 13.109,13.749 13.109,14.687 13.006,14.79 12.91,14.79 C8.2 12.45,15.2 11.65,16 TP18.1
Z0_P: J2.4 R4.1 TP16.1 U2.2 | length 13.9
  L1 - Primary w0.15: J2.4 6.81,10.89 7.119,11.199 7.739,11.199 9.07,12.53 9.554,12.53 9.575,12.509 9.901,12.509 9.989,12.421 9.989,12.269 10.193,12.065 U2.2 11.034,12.065 11.238,12.269 11.238,12.421 11.326,12.509 12.409,12.509 13.491,13.591 13.491,14.687 13.579,14.775 13.675,14.775 R4.1 14.15,15.2 14.95,16 TP16.1
Z1: D3.1 J3.5 TP6.1 U1.3 | length 21.7
  L1 - Primary w0.15: U1.3 v1(11.938,27.94) ; v1(22.225,21.844) 22.776,21.844 23.932,20.687 D3.1 ; TP6.1 D3.1 ; J3.5 25.772,21.273 25.137,20.637 D3.1
  L4 - Secondary w0.15: v1(11.938,27.94) 12.56,27.94 14,26.5 15.75,26.5 20.406,21.844 v1(22.225,21.844)
Z1_N: C3.2 J1.3 TP9.1 U1.1 | length 12.2
  L1 - Primary w0.15: J1.3 6.81,29.035 7.119,28.726 7.679,28.726 8.989,30.036 9.901,30.036 9.989,30.124 9.989,30.276 10.193,30.48 U1.1 11.034,30.48 11.238,30.276 11.238,30.124 11.326,30.036 12.002,30.036 12.763,30.797 12.763,31.618 12.25,32.131 C3.2 12.156,32.131 10.3,33.987 TP9.1
Z1_P: J1.4 R1.1 TP4.1 U1.2 | length 12.8
  L1 - Primary w0.15: J1.4 6.81,28.035 7.119,28.344 7.837,28.344 9.147,29.654 9.901,29.654 9.989,29.566 9.989,29.414 10.193,29.21 U1.2 11.034,29.21 11.238,29.414 11.238,29.566 11.326,29.654 12.16,29.654 13.145,30.639 13.145,31.618 13.233,31.706 13.291,31.706 R1.1 13.766,32.131 15.134,33.499 15.178,33.499 TP4.1
pads on no net: J3.1 J3.7 U1.13 U2.13

## Polygon pours and split planes (outlines as drawn)
5V on L1 - Primary "5V_L01_P014" (solid, pour order 14): 6.096,13.43 6.096,12.355 7.783,12.355 8.89,13.462 8.89,13.843 8.636,14.097 8.128,14.097 7.461,13.43
5V on L1 - Primary "5V_L01_P005" (solid, pour order 5): 6.096,30.575 6.096,29.5 7.783,29.5 8.89,30.607 8.89,30.988 8.636,31.242 8.128,31.242 7.461,30.575
GND on L1 - Primary "GND_L01_P013" (solid, pour order 13): 24.75,3.25 26.25,4.75 29.25,4.75 29.25,1 28.5,0.25 20.5,0.25 20.5,3.25
GND on L1 - Primary "GND_L01_P012" (solid, pour order 12): 4,5.7 3.5,6.2 3.5,8.7 4,9.2 4,11.9 5.6,13.5 7.2,13.5 7.2,14.3 4,17.5 4,22.7 3.25,23.45 3.25,25.75 4,26.5 4,29.2 5.5,30.7 7.2,30.7 7.2,32.2 5.525,33.875 1.625,33.875 0.5,32.75 0.5,2.25 1.25,1.5 4,1.5
5V on L1 - Primary "L1 - Primary-5V" (solid, pour order 11): 20.066,32.3 20.066,33.866 20.7,34.5 24.4,34.5 25.315,33.585 25.315,31.327 26.289,30.353 28.321,30.353 29.591,29.083 29.591,13.335 28.448,12.192 26.543,12.192 25.908,12.827 15.494,12.827 14.986,13.335 14.986,14.224 15.494,14.732 15.875,15.113 27.94,15.113 27.94,27.432 26.67,27.432 24.13,29.972 15.494,29.972 14.859,30.607 14.859,31.369 15.79,32.3
5V on L4 - Secondary "5V_L04_P015" (solid, pour order 15): 7.25,13.5 9,15.25 20.5,15.25 20.5,13.75 10,13.75 8.5,12.25 7.25,12.25
5V on L4 - Secondary "5V_L04_P003" (solid, pour order 3): 7.239,30.607 7.239,29.464 7.747,29.464 11.176,32.893 14.478,32.893 16.129,31.242 18.288,31.242 18.796,31.75 18.796,32.004 18.288,32.512 16.764,32.512 15.24,34.036 10.668,34.036
GND on L3 - GND "GND_L03_P009" (solid, pour order 9): 0,1.905 0,33.02 cw(c1.905,33.02) 1.905,34.925 27.94,34.925 cw(c27.94,33.02) 29.845,33.02 29.845,1.905 cw(c27.94,1.905) 27.94,0 1.905,0 cw(c1.905,1.905)
GND on L2 - GND "GND_L02_P008" (solid, pour order 8): 0,1.905 0,33.02 cw(c1.905,33.02) 1.905,34.925 27.94,34.925 cw(c27.94,33.02) 29.845,33.02 29.845,1.905 cw(c27.94,1.905) 27.94,0 1.905,0 cw(c1.905,1.905)

## Silkscreen, mask and mechanical layers (free items; w line width, h text height)
Top Overlay:
  circle w0.254: c7.747,14.224 r0.127
  circle w0.254: c7.747,31.369 r0.127
  text "Z1_N" at 7.262,33.792 h1
  text "Z1_P" at 16.47,33.692 h1
  text "+5V" at 21.64,30.861 h1.14
  text "A1" at 24.735,27.379 h1
  text "B1_P" at 18.458,25.467 h1
  text "B1" at 24.768,24.179 h1
  text "A1_N" at 9.867,19.582 h1 r270
  text "A1_P" at 16.167,19.475 h1 r270
  text "Z1" at 24.769,18.979 h1
  text "B1_N" at 18.451,18.667 h1
  text "Z0_P" at 17.859,15.767 h1
  text "Z0_N" at 6.952,15.667 h1
  text "RS422  / BREAKOUT  / REV1.1" at 20.07,14.946 h1.25
  text "A0" at 24.674,11.584 h1
  text "B0" at 24.707,8.878 h1
  text "B0_P" at 18.358,7.967 h1
  text "Z0" at 24.708,3.784 h1
  text "A0_N" at 8.767,3.282 h1 r270
  text "A0_P" at 17.367,3.275 h1 r270
  text "GND" at 25.107,1.35 h1.14
  text "B0_N" at 18.351,1.067 h1
Bottom Overlay:
  drawing of 16 lines, arcs and shapes, not listed
  text "THIS SIDE HANGS AWAY FROM THE ODRIVE" at 3.558,30.292 h2 r90
  text "WHEN CONNECTED TO ODRIVE, THIS SIDE FACING UP" at 24.627,15.849 h2
  text "FEB 2023" at 12.006,7.874 h1.52
  text "FARRIS MATAR" at 24.706,2.54 h1.52
Board Shape:
  the board outline again, w0.254

## Text inside footprints (layer, text, board x,y; h text height)
U1: Mechanical 13 "*" at 11.405,29.693 h1.27
U2: Mechanical 13 "*" at 11.405,12.548 h1.27